# EAGLE board firedetectionUsingwifimoduleThingspeak example (EAGLE 9.7.0)

Size 260.07 x 165.8 mm. Coordinates in mm from the lower left corner, seen from the top.
Outline: 0,0 260.07,0 260.07,165.8 0,165.8 0,0
Copper layers (1*16): Top 0.035mm / dielectric 1.5mm / Bottom 0.035mm
Design rules "default": minimum track width 6mil, minimum drill 0.35mm, track to track 6mil, track to pad 6mil, pad to pad 6mil, via to via 6mil, smd to smd 6mil, copper to edge 40mil, drill to drill 6mil, minimum pad ring 10mil, minimum via ring 8mil, stop-mask expansion 4mil, vias tented up to drill 0mil, thermal gap 10mil

## Footprints (pad centres in the part's own frame; a part is rotated, then mirrored left to right if it is on the bottom)
LEDRD254W60D565H860B = drill 0.981 pad 1.581: 1 -1.27,0; 2 1.27,0
LEDRD254W60D565H860B_G = drill 0.981 pad 1.581: 1 -1.27,0; 2 1.27,0
MQ-XX-SOCKET = drill 1.27: 1 -6.223,6.223; 2 -8.788,0; 3 -6.223,-6.223; 4 6.223,-6.223; 5 8.788,0; 6 6.223,6.223
PIEZO = drill 1 pad 1.6: 1 -3.5,0; 2 3.5,0
RESAD1016W63L850D250B = drill 0.83 pad 1.43: 1 -5.08,0; 2 5.08,0
ARDUINO-UNO-R3-SHIELD = drill 1.016 pad 1.88: 3.3V 24.13,-2.54; 5V 24.13,0; A0 24.13,12.7; A1 24.13,15.24; A2 24.13,17.78; A3 24.13,20.32; A4 24.13,22.86; A5 24.13,25.4; AREF -24.13,-13.97; D2 -24.13,20.32; D3 -24.13,17.78; D4 -24.13,15.24; D5 -24.13,12.7; D6 -24.13,10.16; D7 -24.13,7.62; D8 -24.13,3.81; D9 -24.13,1.27; D10 -24.13,-1.27; D11 -24.13,-3.81; D12 -24.13,-6.35; D13 -24.13,-8.89; GND@0 24.13,2.54; GND@1 24.13,5.08; GND@2 -24.13,-11.43; IOREF 24.13,-7.62; NC 24.13,-10.16; RES 24.13,-5.08; RX -24.13,25.4; SCL -24.13,-19.05; SDA -24.13,-16.51; TX -24.13,22.86; VIN 24.13,7.62
1X08 = drill 1.016 long: 1 -8.89,0; 2 -6.35,0; 3 -3.81,0; 4 -1.27,0; 5 1.27,0; 6 3.81,0; 7 6.35,0; 8 8.89,0
TO92 = drill 0.813 octagon: 1 -1.27,0; 2 0,1.905; 3 1.27,0
JHD-162A = drill 1.016 long: 1 -19.05,0; 2 -16.51,0; 3 -13.97,0; 4 -11.43,0; 5 -8.89,0; 6 -6.35,0; 7 -3.81,0; 8 -1.27,0; 9 1.27,0; 10 3.81,0; 11 6.35,0; 12 8.89,0; 13 11.43,0; 14 13.97,0; 15 16.51,0; 16 19.05,0

## Placement (x,y rotation side)
D2  RED  [LEDRD254W60D565H860B]  204.22,74.46 180 top
D3  GREEN  [LEDRD254W60D565H860B_G]  234.69,74.46 180 top
GAS3  GAS-SENSORMQ-XX-SOCKET  [MQ-XX-SOCKET]  201.2,112.95 270 top
PIEZO1  PIEZO  [PIEZO]  237.94,98.66 0 top
R1  10k  [RESAD1016W63L850D250B]  149,57.7 0 top
R2  20k  [RESAD1016W63L850D250B]  154.08,52.62 90 top
R4  1k  [RESAD1016W63L850D250B]  192.85,8.97 90 top
R6  4.7k  [RESAD1016W63L850D250B]  208.03,89.7 90 top
R7  1k  [RESAD1016W63L850D250B]  253.75,89.7 90 top
R8  220  [RESAD1016W63L850D250B]  228.34,71.92 0 top
R9  220  [RESAD1016W63L850D250B]  197.87,71.92 0 top
R10  1k  [RESAD1016W63L850D250B]  205.49,33.82 90 top
U1  ARDUINO-UNO-R3-SHIELD  [ARDUINO-UNO-R3-SHIELD]  84.65,83.23 270 top
U2  PINHD-1X08_1X08M  [1X08]  164.35,87.18 0 top
U3  TMP36GT9Z_TO92  [TO92]  99.22,37.01 180 top
U5  LCD-16X2JHD-162A  [JHD-162A]  30.73,158.26 0 top

## Library data of the parts
D2 = Tinkercad; CATEGORY: Opto-Electronic; SUB-CATEGORY: LED; VALUE: LED_RED
D3 = Tinkercad; CATEGORY: Opto-Electronic; SUB-CATEGORY: LED; VALUE: LED_GREEN
GAS3 PIEZO1 R1 R2 R4 R6-R10 U1-U3 U5 = Tinkercad

## Nets
D2_C: D2.2 R9.2
D3_C: D3.2 R8.2
PIEZO1_2: PIEZO1.2 R7.2
R2_2: R1.2 R2.2 U2.8
U1_5V: GAS3.1 GAS3.2 GAS3.3 R4.2 U1.5V U3.3 U5.2
U1_A0: U1.A0 U3.2
U1_A1: GAS3.4 GAS3.6 R6.2 U1.A1
U1_D2: D2.1 U1.D2
U1_D3: D3.1 U1.D3
U1_D4: PIEZO1.1 U1.D4
U1_D5: U1.D5 U5.4
U1_D6: U1.D6 U5.6
U1_D8: U1.D8 U5.11
U1_D9: U1.D9 U5.12
U1_D10: U1.D10 U5.13
U1_D11: U1.D11 U5.14
U1_GND: GAS3.5 R2.1 R6.1 R7.1 R8.1 R9.1 R10.2 U1.GND@0 U1.GND@1 U1.GND@2 U2.2 U5.1 U5.3 U5.5 U5.16
U1_RX: U1.RX U2.3
U1_TX: R1.1 U1.TX
U2_1: U1.3.3V U2.1 U2.4 U2.5
U3_GND: R10.1 U3.1
U5_LED+: R4.1 U5.15

## Tracks (layer width: path | path; a pad name or v marks a point on that pad's centre or on a via)
D2_C  (1 unrouted)
D3_C  (1 unrouted)
PIEZO1_2  (1 unrouted)
R2_2  (2 unrouted)
U1_5V  (6 unrouted)
U1_A0  (1 unrouted)
U1_A1  (3 unrouted)
U1_D2  (1 unrouted)
U1_D3  (1 unrouted)
U1_D4  (1 unrouted)
U1_D5  (1 unrouted)
U1_D6  (1 unrouted)
U1_D8  (1 unrouted)
U1_D9  (1 unrouted)
U1_D10  (1 unrouted)
U1_D11  (1 unrouted)
U1_GND  (14 unrouted)
U1_RX  (1 unrouted)
U1_TX  (1 unrouted)
U2_1  (3 unrouted)
U3_GND  (1 unrouted)
U5_LED+  (1 unrouted)